# Altium PCB MPBoard_ext.PcbDoc (part 1 of 3)
Units mm, origin at the board's own origin, x right, y up, seen from the top; angles counter-clockwise.
Board outline 305 x 110 mm, 2 copper layers (Top Layer, Bottom Layer), stack 1.571 mm thick; 340 components, 268 nets, 1174 pads, 215 vias.
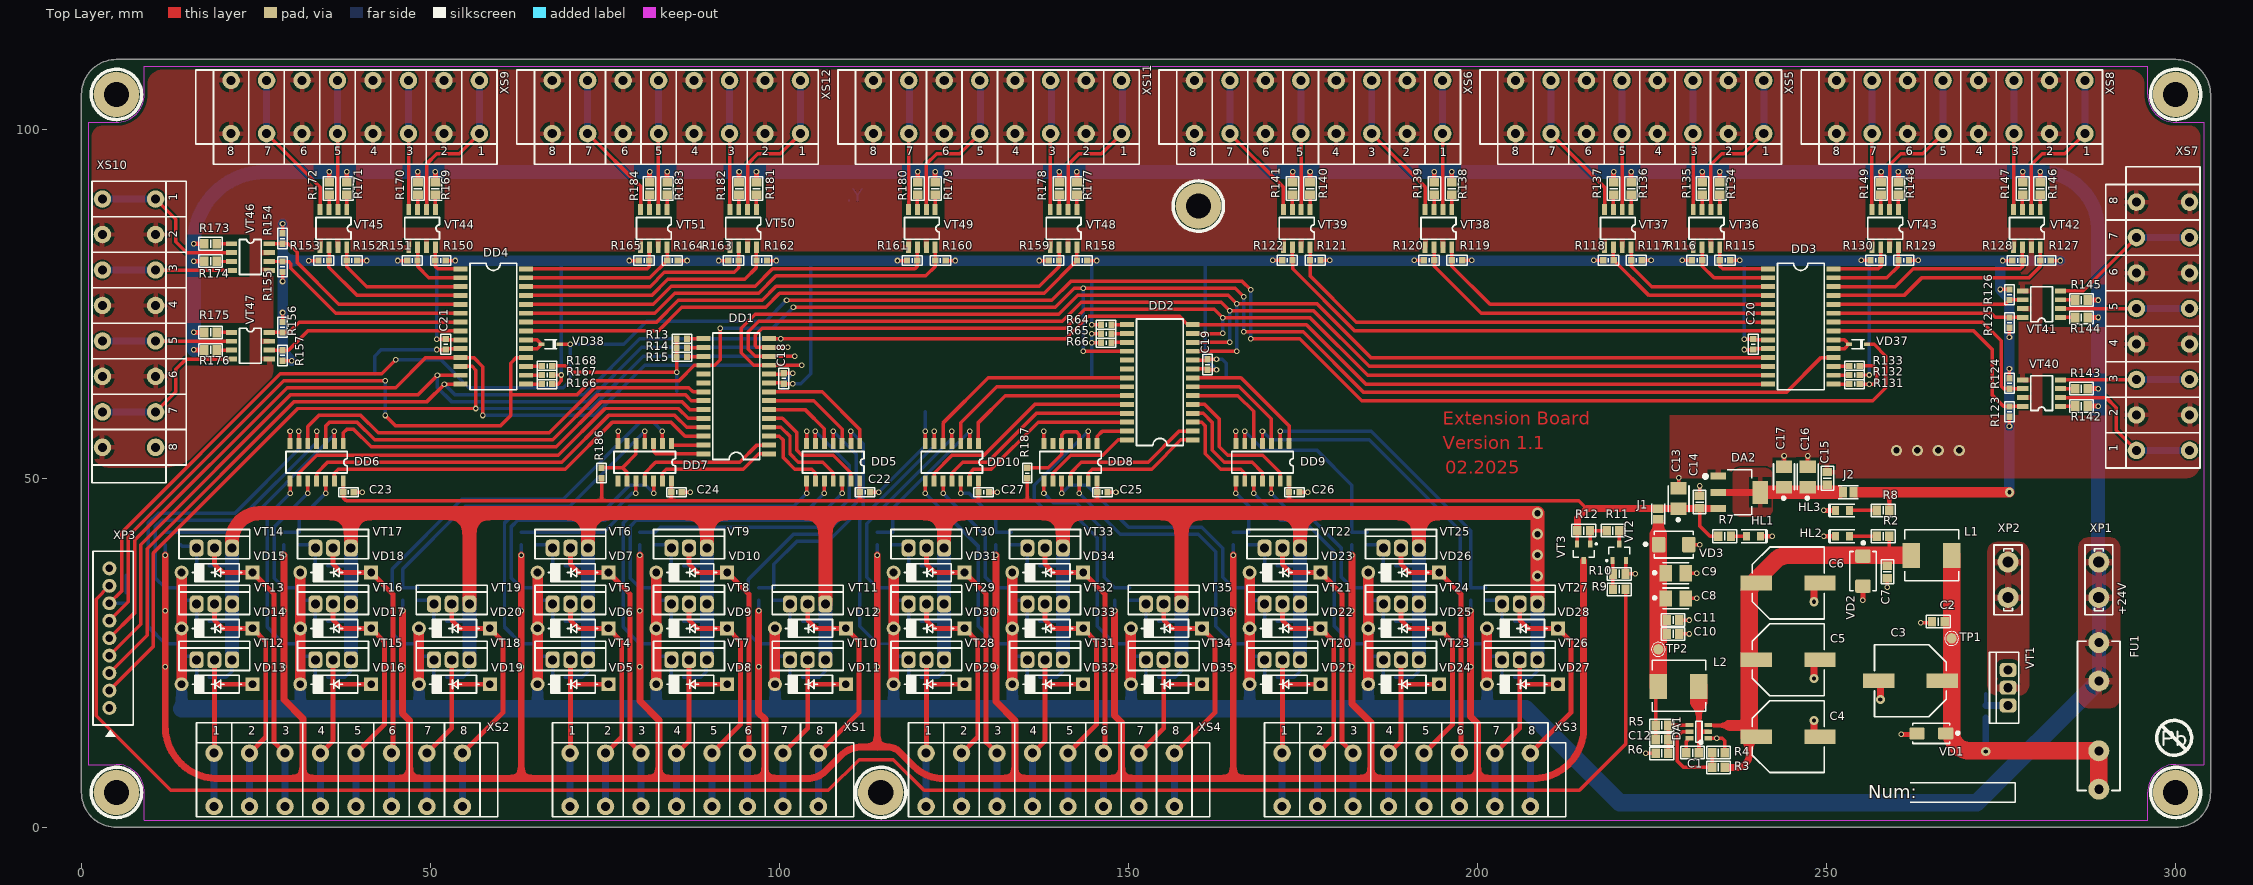
[diagram p0: Top Layer view]
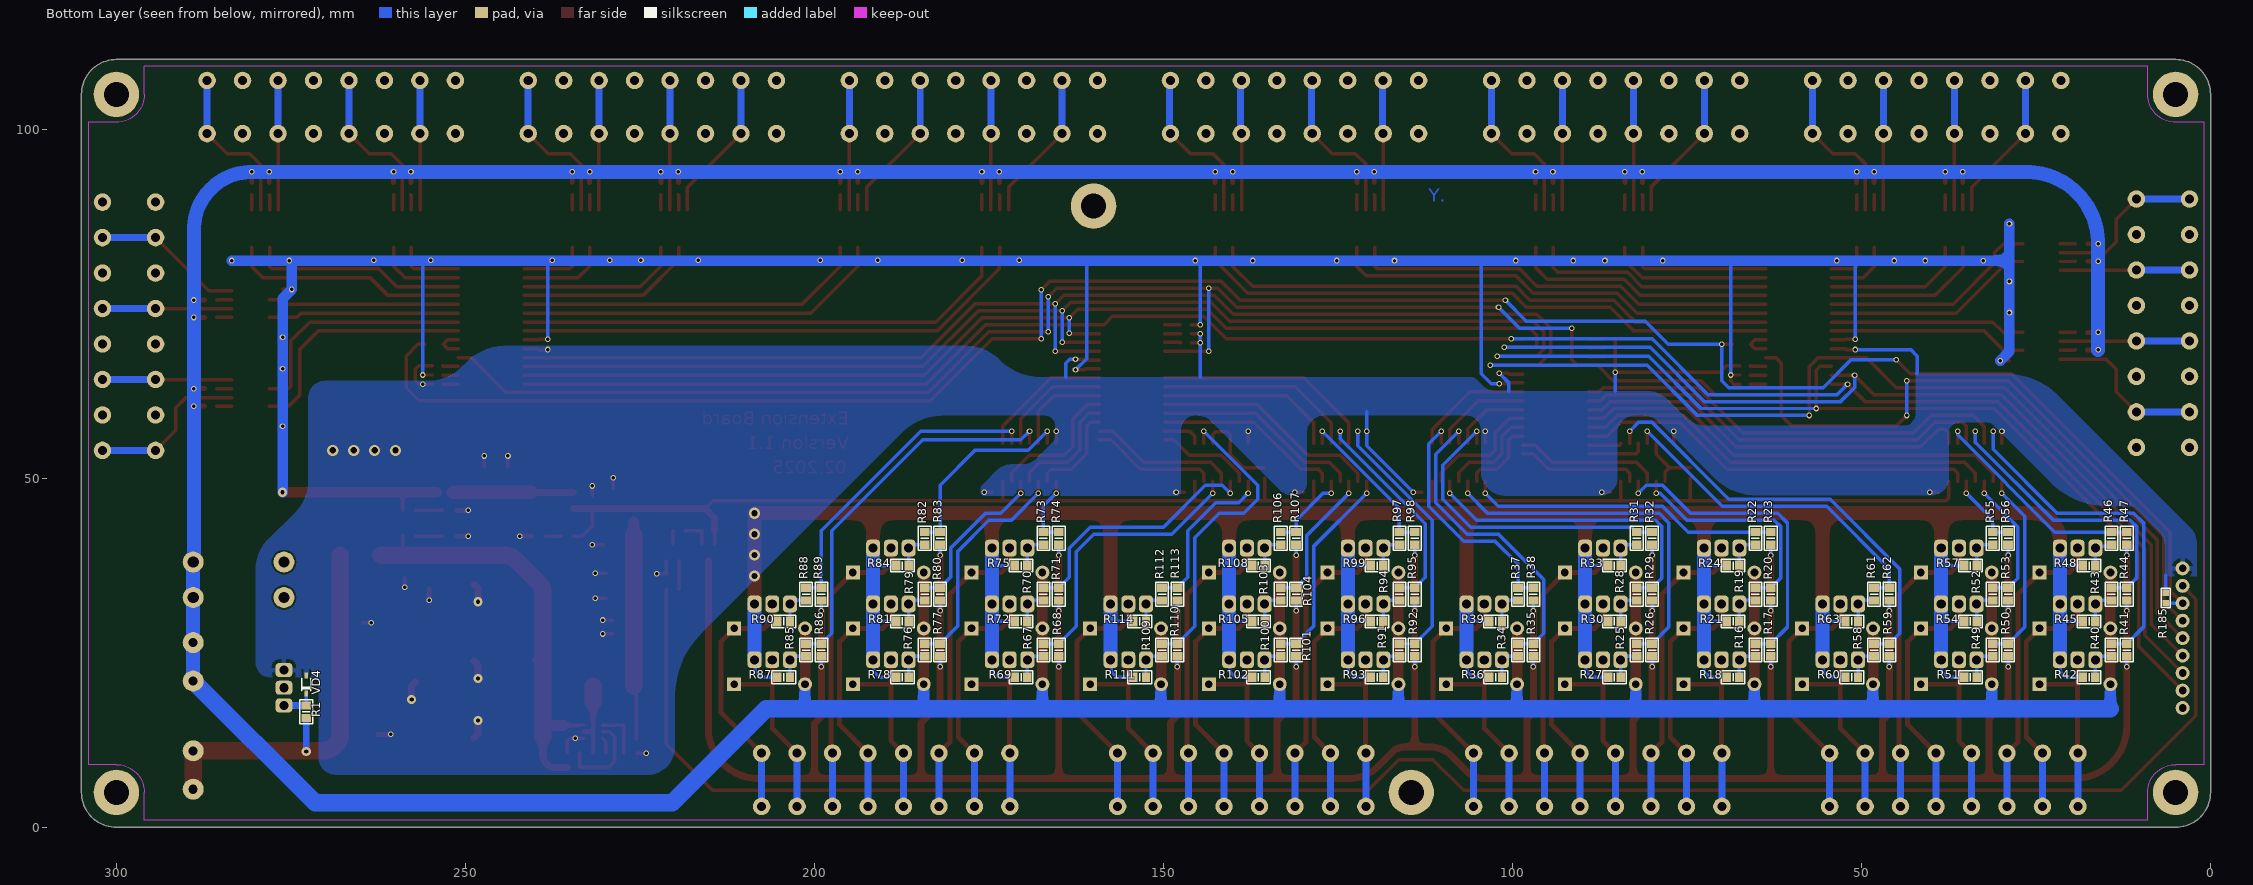
[diagram p1: Bottom Layer view, seen from below]
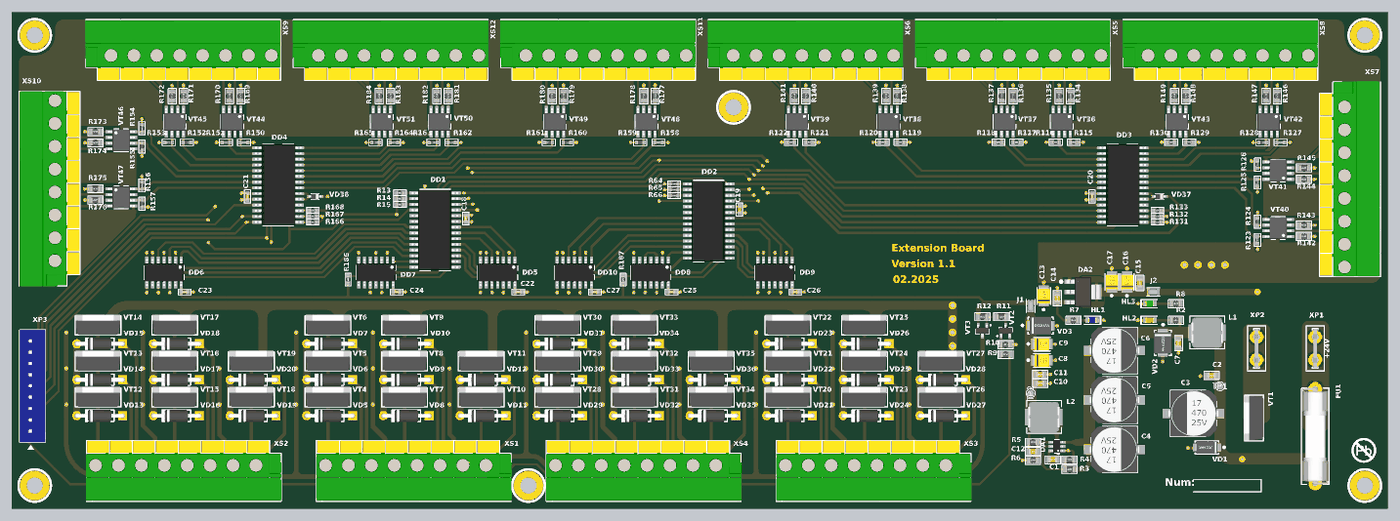
[diagram p4: 3D render of the assembled board from above, using the file's embedded part models]
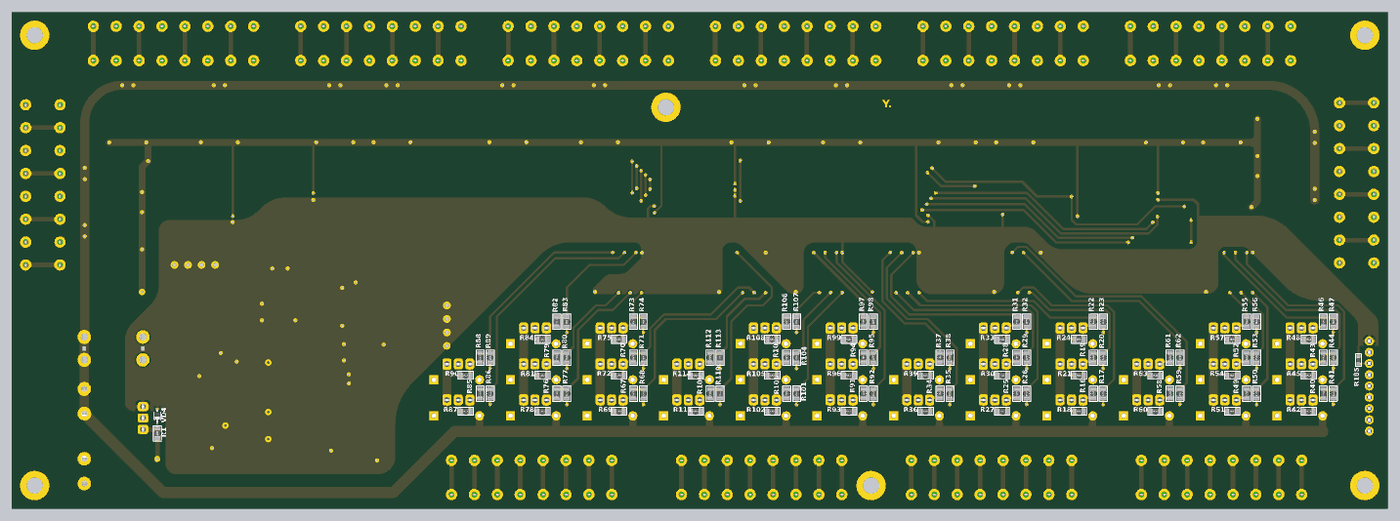
[diagram p5: 3D render of the assembled board from below, using the file's embedded part models]

## Layer stack, top to bottom
Top Solder: solder mask 0.0102, Solder Resist, Dk 3.5
Top Layer: signal copper 0.0356
Dielectric 1: dielectric 1.5, FR-4, Dk 4.8
Bottom Layer: signal copper 0.0356
Bottom Solder: solder mask 0.0102, Solder Resist, Dk 3.5

## Board outline
0,5 0,105 cw(c5,105) 5,110 300,110 cw(c300,105) 305,105 305,5 cw(c300,5) 300,0 5,0 cw(c5,5)

## Design rules (kind name [scope] priority, off if disabled: settings)
Clearance [All] p1: gap=0.25 ignorepadtopadclearanceinfootprint=FALSE
HoleSize [All] p1: absolutevalues=TRUE maxlimit=3.6 minlimit=0.3 maxpercent=80.000 minpercent=20.000
MinimumSolderMaskSliver [All] p1: minsoldermaskwidth=0.05
PolygonConnect gng_top_ploy [IsNamedPolygon('DA2_POLY')] p1: thpad.connectstyle=Relief thpad.reliefconductorwidth=0.7 thpad.reliefentries=4 thpad.polygonreliefangle="90 Angle" thpad.airgapwidth=0.5 smdpad.connectstyle=Relief smdpad.reliefconductorwidth=0.7 smdpad.reliefentries=4 smdpad.polygonreliefangle="90 Angle" smdpad.airgapwidth=0.5 via.connectstyle=Direct via.reliefconductorwidth=0.7 via.reliefentries=4 via.polygonreliefangle="90 Angle" via.airgapwidth=0.5
PolygonConnect PolygonConnect_1 [All] p2: connectstyle=Relief reliefconductorwidth=0.5 reliefentries=4 polygonreliefangle="90 Angle" airgapwidth=0.5
RoutingVias [All] p1: holewidth=0.711 width=1.27 viastyle="Through Hole" minholewidth=0.711 minwidth=1.27 maxholewidth=0.711 maxwidth=1.27 useviatemplates=TRUE viatemplateguid#1={889E8135-1AD9-4337-A910-FD1DCEA28EF9} viatemplateguid#2={62D4C57B-6C9A-40F8-BB9A-F52042807E24} viatemplateguid#3={B69EEB49-2FE6-4CAA-9D47-318B18BA1668} viatemplatename#1=v80h50 viatemplatename#2=v130h60 viatemplatename#3=v160h90
SilkToSilkClearance [All] p1: silktosilkclearance=0
SilkToSolderMaskClearance [IsPad] p1: minsilkscreentomaskgap=0.05 clearancetoexposedcopper=TRUE
SolderMaskExpansion [All] p1: expansion=0.05 istentingtop=FALSE
Width [All] p1: maxlimit=2.5 minlimit=0.3 preferedwidth=0.5
26 further rules are at their usual default settings.

## Components (designator, comment, footprint, x,y, rotation, side; value= is the part's Value field where it differs from the comment)
C1 "0,1 мкФ" CAP-0805 230.8,10.7 r0 top
C2 "0,1 мкФ" CAP-0805 266,29.46 r180 top
C3 "33 мкФ" CAPAE-103 262,21 r180 top
C4 "33 мкФ" CAPAE-103 244.5,13 r0 top
C5 "33 мкФ" CAPAE-103 244.5,24 r0 top
C6 "33 мкФ" CAPAE-103 244.5,35 r0 top
C7 "0,1 мкФ" CAP-0805 258.7,36.6 r270 top
C8 "47 мкФ" CAPMP-3528 228.4,32.8 r0 top
C9 "47 мкФ" CAPMP-3528 228.4,36.4 r0 top
C10 "0,1 мкФ" CAP-0805 228,27.7 r0 top
C11 "0,1 мкФ" CAP-0805 228,29.7 r0 top
C12 "68 пФ" CAP-0805 226.4,12.6 r0 top
C13 "10 мкФ" CAPMP-3528 228.8,47.1 r90 top
C14 "0,1 мкФ" CAP-0805 231.8,46.6 r270 top
C15 "0,1 мкФ" CAP-0805 250.1,50 r270 top
C16 "10 мкФ" CAPMP-3528 247.3,50.2 r90 top
C17 "10 мкФ" CAPMP-3528 243.9,50.2 r90 top
C18 "0,1 мкФ" CAP-0603 100.6,64.3 r270 top
C19 "0,1 мкФ" CAP-0603 161.3,66.3 r270 top
C20 "0,1 мкФ" CAP-0603 239.5,69.2 r90 top
C21 "0,1 мкФ" CAP-0603 52.2,69.2 r90 top
C22 "0,1 мкФ" CAP-0603 112.25,48 r180 top
C23 "0,1 мкФ" CAP-0603 38.25,48 r180 top
C24 "0,1 мкФ" CAP-0603 85.25,48 r180 top
C25 "0,1 мкФ" CAP-0603 146.25,48 r180 top
C26 "0,1 мкФ" CAP-0603 173.75,48 r180 top
C27 "0,1 мкФ" CAP-0603 129.25,48 r180 top
DA1 "TPS54302" SOT23-6 231.7,13.7 r180 top
DA2 "LD1117AS33" "SOT-223 LD1117" 237.5,48 r0 top
DD1 "MCP23S17" SOIC-28 98.5,53.5 r180 top
DD2 "MCP23S17" SOIC-28 159.2,55.5 r180 top
DD3 "MCP23S17" SOIC-28 241.6,80 r0 top
DD4 "MCP23S17" SOIC-28 54.3,80 r0 top
DD5 "SN74LS07D" SOIC-14 111.5,55 r270 top
DD6 "SN74LS07D" SOIC-14 37.5,55 r270 top
DD7 "SN74LS07D" SOIC-14 84.5,55 r270 top
DD8 "SN74LS07D" SOIC-14 145.5,55 r270 top
DD9 "SN74LS07D" SOIC-14 173,55 r270 top
DD10 "SN74LS07D" SOIC-14 128.5,55 r270 top
FU1 "1 A" "FUSE HOLDERS B 5X20" 289,26.46 r270 top
HL1 "Blue" CH0805LB 239.5,41.7 r0 top
HL2 "Red" CH0805LR 252.3,41.7 r180 top
HL3 "Green" CH0805LG 252.3,45.4 r180 top
J1 "Jumper for PCB" "JUMPER-SMD min" 225.9,44.9 r90 top
J2 "Jumper for PCB" "JUMPER-SMD min" 253.1,48 r0 top
L1 "10 мкГн" IND_IHLP2525 265,38.96 r180 top
L2 "10 мкГн" IND_IHLP2525 228.8,20.2 r180 top
R1 "4,7 кОм" RES-0805 272.8,16.56 r270 bottom
R2 "21 кОм" RES-0805 258.1,41.7 r0 top
R3 "560 кОм" RES-0805 234.5,8.6 r180 top
R4 "33 кОм" RES-0805 234.5,10.7 r0 top
R5 "100 кОм" RES-0805 226.4,14.6 r0 top
R6 "13,3 кОм" RES-0805 226.4,10.6 r180 top
R7 "4,3 кОм" RES-0805 235.4,41.7 r0 top
R8 "2 кОм" RES-0805 258.1,45.4 r180 top
R9 "100 Ом" RES-0805 220.3,34.1 r180 top
R10 "4,7 кОм" RES-0805 220.3,36.3 r0 top
R11 "1 кОм" RES-0805 219.4,42.5 r180 top
R12 "4,7 кОм" RES-0805 215.2,42.5 r180 top
R13 "10 кОм" RES-0603#1 86,70 r0 top
R14 "10 кОм" RES-0603#1 86,68.7 r0 top
R15 "10 кОм" RES-0603#1 86,67.4 r0 top
R16 "100 Ом" RES-0805 65.2,25.4 r270 bottom
R17 "390 Ом" RES-0805 63,25.4 r90 bottom
R18 "10 кОм" RES-0805 68.4,21.5 r180 bottom
R19 "100 Ом" RES-0805 65.2,33.4 r270 bottom
R20 "390 Ом" RES-0805 63,33.4 r90 bottom
R21 "10 кОм" RES-0805 68.4,29.5 r180 bottom
R22 "100 Ом" RES-0805 65.2,41.4 r270 bottom
R23 "390 Ом" RES-0805 63,41.4 r90 bottom
R24 "10 кОм" RES-0805 68.4,37.5 r180 bottom
R25 "100 Ом" RES-0805 82.2,25.4 r270 bottom
R26 "390 Ом" RES-0805 80,25.4 r90 bottom
R27 "10 кОм" RES-0805 85.4,21.5 r180 bottom
R28 "100 Ом" RES-0805 82.2,33.4 r270 bottom
R29 "390 Ом" RES-0805 80,33.4 r90 bottom
R30 "10 кОм" RES-0805 85.4,29.5 r180 bottom
R31 "100 Ом" RES-0805 82.2,41.4 r270 bottom
R32 "390 Ом" RES-0805 80,41.4 r90 bottom
R33 "10 кОм" RES-0805 85.4,37.5 r180 bottom
R34 "100 Ом" RES-0805 99.2,25.4 r270 bottom
R35 "390 Ом" RES-0805 97,25.4 r90 bottom
R36 "10 кОм" RES-0805 102.4,21.5 r180 bottom
R37 "100 Ом" RES-0805 99.2,33.4 r270 bottom
R38 "390 Ом" RES-0805 97,33.4 r90 bottom
R39 "10 кОм" RES-0805 102.4,29.5 r180 bottom
R40 "100 Ом" RES-0805 14.2,25.4 r270 bottom
R41 "390 Ом" RES-0805 12,25.4 r90 bottom
R42 "10 кОм" RES-0805 17.4,21.5 r180 bottom
R43 "100 Ом" RES-0805 14.2,33.4 r270 bottom
R44 "390 Ом" RES-0805 12,33.4 r90 bottom
R45 "10 кОм" RES-0805 17.4,29.5 r180 bottom
R46 "100 Ом" RES-0805 14.2,41.4 r270 bottom
R47 "390 Ом" RES-0805 12,41.4 r90 bottom
R48 "10 кОм" RES-0805 17.4,37.5 r180 bottom
R49 "100 Ом" RES-0805 31.2,25.4 r270 bottom
R50 "390 Ом" RES-0805 29,25.4 r90 bottom
R51 "10 кОм" RES-0805 34.4,21.5 r180 bottom
R52 "100 Ом" RES-0805 31.2,33.4 r270 bottom
R53 "390 Ом" RES-0805 29,33.4 r90 bottom
R54 "10 кОм" RES-0805 34.4,29.5 r180 bottom
R55 "100 Ом" RES-0805 31.2,41.4 r270 bottom
R56 "390 Ом" RES-0805 29,41.4 r90 bottom
R57 "10 кОм" RES-0805 34.4,37.5 r180 bottom
R58 "100 Ом" RES-0805 48.2,25.4 r270 bottom
R59 "390 Ом" RES-0805 46,25.4 r90 bottom
R60 "10 кОм" RES-0805 51.4,21.5 r180 bottom
R61 "100 Ом" RES-0805 48.2,33.4 r270 bottom
R62 "390 Ом" RES-0805 46,33.4 r90 bottom
R63 "10 кОм" RES-0805 51.4,29.5 r180 bottom
R64 "10 кОм" RES-0603#2 146.8,72 r180 top
R65 "10 кОм" RES-0603#2 146.8,70.7 r0 top
R66 "10 кОм" RES-0603#2 146.8,69.4 r0 top
R67 "100 Ом" RES-0805 167.2,25.4 r270 bottom
R68 "390 Ом" RES-0805 165,25.4 r90 bottom
R69 "10 кОм" RES-0805 170.4,21.5 r180 bottom
R70 "100 Ом" RES-0805 167.2,33.4 r270 bottom
R71 "390 Ом" RES-0805 165,33.4 r90 bottom
R72 "10 кОм" RES-0805 170.4,29.5 r180 bottom
R73 "100 Ом" RES-0805 167.2,41.4 r270 bottom
R74 "390 Ом" RES-0805 165,41.4 r90 bottom
R75 "10 кОм" RES-0805 170.4,37.5 r180 bottom
R76 "100 Ом" RES-0805 184.2,25.4 r270 bottom
R77 "390 Ом" RES-0805 182,25.4 r90 bottom
R78 "10 кОм" RES-0805 187.4,21.5 r180 bottom
R79 "100 Ом" RES-0805 184.2,33.4 r270 bottom
R80 "390 Ом" RES-0805 182,33.4 r90 bottom
R81 "10 кОм" RES-0805 187.4,29.5 r180 bottom
R82 "100 Ом" RES-0805 184.2,41.4 r270 bottom
R83 "390 Ом" RES-0805 182,41.4 r90 bottom
R84 "10 кОм" RES-0805 187.4,37.5 r180 bottom
R85 "100 Ом" RES-0805 201.2,25.4 r270 bottom
R86 "390 Ом" RES-0805 199,25.4 r90 bottom
R87 "10 кОм" RES-0805 204.4,21.5 r180 bottom
R88 "100 Ом" RES-0805 201.2,33.4 r270 bottom
R89 "390 Ом" RES-0805 199,33.4 r90 bottom
R90 "10 кОм" RES-0805 204.4,29.5 r180 bottom
R91 "100 Ом" RES-0805 116.2,25.4 r270 bottom
R92 "390 Ом" RES-0805 114,25.4 r90 bottom
R93 "10 кОм" RES-0805 119.4,21.5 r180 bottom
R94 "100 Ом" RES-0805 116.2,33.4 r270 bottom
R95 "390 Ом" RES-0805 114,33.4 r90 bottom
R96 "10 кОм" RES-0805 119.4,29.5 r180 bottom
R97 "100 Ом" RES-0805 116.2,41.4 r270 bottom
R98 "390 Ом" RES-0805 114,41.4 r90 bottom
R99 "10 кОм" RES-0805 119.4,37.5 r180 bottom
R100 "100 Ом" RES-0805 133.2,25.4 r270 bottom
R101 "390 Ом" RES-0805 131,25.4 r90 bottom
R102 "10 кОм" RES-0805 136.4,21.5 r180 bottom
R103 "100 Ом" RES-0805 133.2,33.4 r270 bottom
R104 "390 Ом" RES-0805 131,33.4 r90 bottom
R105 "10 кОм" RES-0805 136.4,29.5 r180 bottom
R106 "100 Ом" RES-0805 133.2,41.4 r270 bottom
R107 "390 Ом" RES-0805 131,41.4 r90 bottom
R108 "10 кОм" RES-0805 136.4,37.5 r180 bottom
R109 "100 Ом" RES-0805 150.2,25.4 r270 bottom
R110 "390 Ом" RES-0805 148,25.4 r90 bottom
R111 "10 кОм" RES-0805 153.4,21.5 r180 bottom
R112 "100 Ом" RES-0805 150.2,33.4 r270 bottom
R113 "390 Ом" RES-0805 148,33.4 r90 bottom
R114 "10 кОм" RES-0805 153.4,29.5 r180 bottom
R115 "4,7кОм" RES-0603#2 235.45,81.25 r0 top
R116 "4,7кОм" RES-0603#2 231.45,81.25 r180 top
R117 "4,7кОм" RES-0603#2 222.75,81.25 r0 top
R118 "4,7кОм" RES-0603#2 218.75,81.25 r180 top
R119 "4,7кОм" RES-0603#2 197.05,81.25 r0 top
R120 "4,7кОм" RES-0603#2 193.05,81.25 r180 top
R121 "4,7кОм" RES-0603#2 176.75,81.25 r0 top
R122 "4,7кОм" RES-0603#2 172.75,81.25 r180 top
R123 "4,7кОм" RES-0603#2 276.2,59.55 r270 top
R124 "4,7кОм" RES-0603#2 276.2,63.6 r90 top
R125 "4,7кОм" RES-0603#2 276.2,72.3 r270 top
R126 "4,7кОм" RES-0603#2 276.2,76.3 r90 top
R127 "4,7кОм" RES-0603#2 281.35,81.2 r0 top
R128 "4,7кОм" RES-0603#2 277.35,81.2 r180 top
R129 "4,7кОм" RES-0603#2 261.05,81.25 r0 top
R130 "4,7кОм" RES-0603#2 257.05,81.25 r180 top
R131 "10 кОм" RES-0603#2 254,63.5 r0 top
R132 "10 кОм" RES-0603#2 254,64.8 r0 top
R133 "10 кОм" RES-0603#2 254,66.1 r180 top
R134 "2,2 кОм" RES-0805 234.7,91.5 r270 top
R135 "2,2 кОм" RES-0805 232.2,91.5 r270 top
R136 "2,2 кОм" RES-0805 222,91.5 r270 top
R137 "2,2 кОм" RES-0805 219.5,91.5 r270 top
R138 "2,2 кОм" RES-0805 196.3,91.5 r270 top
R139 "2,2 кОм" RES-0805 193.8,91.5 r270 top
R140 "2,2 кОм" RES-0805 176,91.5 r270 top
R141 "2,2 кОм" RES-0805 173.5,91.5 r270 top
R142 "2,2 кОм" RES-0805 286.5,60.34 r180 top
R143 "2,2 кОм" RES-0805 286.5,62.84 r180 top
R144 "2,2 кОм" RES-0805 286.5,73.04 r180 top
R145 "2,2 кОм" RES-0805 286.5,75.54 r180 top
R146 "2,2 кОм" RES-0805 280.6,91.5 r270 top
R147 "2,2 кОм" RES-0805 278.1,91.5 r270 top
R148 "2,2 кОм" RES-0805 260.3,91.5 r270 top
R149 "2,2 кОм" RES-0805 257.8,91.5 r270 top
R150 "4,7кОм" RES-0603#2 51.45,81.2 r0 top
R151 "4,7кОм" RES-0603#2 47.4,81.2 r180 top
R152 "4,7кОм" RES-0603#2 38.75,81.2 r0 top
R153 "4,7кОм" RES-0603#2 34.7,81.2 r180 top
R154 "4,7кОм" RES-0603#2 28.8,84.35 r90 top
R155 "4,7кОм" RES-0603#2 28.8,80.3 r270 top
R156 "4,7кОм" RES-0603#2 28.8,71.65 r90 top
R157 "4,7кОм" RES-0603#2 28.8,67.6 r270 top
R158 "4,7кОм" RES-0603#2 143.35,81.2 r0 top
R159 "4,7кОм" RES-0603#2 139.3,81.2 r180 top
R160 "4,7кОм" RES-0603#2 123.05,81.2 r0 top
R161 "4,7кОм" RES-0603#2 119,81.2 r180 top
R162 "4,7кОм" RES-0603#2 97.45,81.2 r0 top
R163 "4,7кОм" RES-0603#2 93.4,81.2 r180 top
R164 "4,7кОм" RES-0603#2 84.65,81.2 r0 top
R165 "4,7кОм" RES-0603#2 80.6,81.2 r180 top
R166 "10 кОм" RES-0603#2 66.7,63.5 r0 top
R167 "10 кОм" RES-0603#2 66.7,64.8 r0 top
R168 "10 кОм" RES-0603#2 66.7,66.1 r180 top
R169 "2,2 кОм" RES-0805 50.7,91.5 r270 top
R170 "2,2 кОм" RES-0805 48.2,91.5 r270 top
R171 "2,2 кОм" RES-0805 38,91.5 r270 top
R172 "2,2 кОм" RES-0805 35.5,91.5 r270 top
R173 "2,2 кОм" RES-0805 18.5,83.6 r0 top
R174 "2,2 кОм" RES-0805 18.5,81.1 r0 top
R175 "2,2 кОм" RES-0805 18.5,70.9 r0 top
R176 "2,2 кОм" RES-0805 18.5,68.4 r0 top
R177 "2,2 кОм" RES-0805 142.6,91.5 r270 top
R178 "2,2 кОм" RES-0805 140.1,91.5 r270 top
R179 "2,2 кОм" RES-0805 122.3,91.5 r270 top
R180 "2,2 кОм" RES-0805 119.8,91.5 r270 top
R181 "2,2 кОм" RES-0805 96.7,91.5 r270 top
R182 "2,2 кОм" RES-0805 94.2,91.5 r270 top
R183 "2,2 кОм" RES-0805 83.9,91.5 r270 top
R184 "2,2 кОм" RES-0805 81.4,91.5 r270 top
R185 "10 кОм" RES-0603#1 6.4,32.85 r270 bottom
R186 "10 кОм" RES-0603#1 74.5,50.75 r90 top
R187 "10 кОм" RES-0603#2 135.5,50.75 r270 top
TP1 "*" TP_1.5 267.9,27.06 r180 top
TP2 "*" TP_1.5 225.9,25.5 r90 top
VD1 "TSSA5U60 E3G" "DIODE SMA" 265,13.46 r0 top
VD2 "SMBJ24CA" "DIODE SMB" 255.2,36.7 r90 top
VD3 "SMBJ5.0CA-TR" "DIODE SMB" 228.1,40.5 r180 top
VD4 "MM3Z12VT1G" SOD-323 272.8,20.46 r270 bottom
VD5 "HER108" DIOD-MILS-400 75.5,20.5 r180 top
VD6 "HER108" DIOD-MILS-400 75.5,28.5 r180 top
VD7 "HER108" DIOD-MILS-400 75.5,36.5 r180 top
VD8 "HER108" DIOD-MILS-400 92.5,20.5 r180 top
VD9 "HER108" DIOD-MILS-400 92.5,28.5 r180 top
VD10 "HER108" DIOD-MILS-400 92.5,36.5 r180 top
VD11 "HER108" DIOD-MILS-400 109.5,20.5 r180 top
VD12 "HER108" DIOD-MILS-400 109.5,28.5 r180 top
VD13 "HER108" DIOD-MILS-400 24.5,20.5 r180 top
VD14 "HER108" DIOD-MILS-400 24.5,28.5 r180 top
VD15 "HER108" DIOD-MILS-400 24.5,36.5 r180 top
VD16 "HER108" DIOD-MILS-400 41.5,20.5 r180 top
VD17 "HER108" DIOD-MILS-400 41.5,28.5 r180 top
VD18 "HER108" DIOD-MILS-400 41.5,36.5 r180 top
VD19 "HER108" DIOD-MILS-400 58.5,20.5 r180 top
VD20 "HER108" DIOD-MILS-400 58.5,28.5 r180 top
VD21 "HER108" DIOD-MILS-400 177.5,20.5 r180 top
VD22 "HER108" DIOD-MILS-400 177.5,28.5 r180 top
VD23 "HER108" DIOD-MILS-400 177.5,36.5 r180 top
VD24 "HER108" DIOD-MILS-400 194.5,20.5 r180 top
VD25 "HER108" DIOD-MILS-400 194.5,28.5 r180 top
VD26 "HER108" DIOD-MILS-400 194.5,36.5 r180 top
VD27 "HER108" DIOD-MILS-400 211.5,20.5 r180 top
VD28 "HER108" DIOD-MILS-400 211.5,28.5 r180 top
VD29 "HER108" DIOD-MILS-400 126.5,20.5 r180 top
VD30 "HER108" DIOD-MILS-400 126.5,28.5 r180 top
VD31 "HER108" DIOD-MILS-400 126.5,36.5 r180 top
VD32 "HER108" DIOD-MILS-400 143.5,20.5 r180 top
VD33 "HER108" DIOD-MILS-400 143.5,28.5 r180 top
VD34 "HER108" DIOD-MILS-400 143.5,36.5 r180 top
VD35 "HER108" DIOD-MILS-400 160.5,20.5 r180 top
VD36 "HER108" DIOD-MILS-400 160.5,28.5 r180 top
VD37 "1N4148WS" SOD-323 254.5,69.2 r0 top
VD38 "1N4148WS" SOD-323 67.2,69.2 r0 top
VT1 "IRFZ44N" "TO220S inline" 276,17.46 r90 top
VT2 "BC846B" SOT23 220.3,39.4 r90 top
VT3 "IRLML9303TRPBF" SOT23 215.2,39.4 r270 top
VT4 "КП745Г" "TO220S inline" 67.5,24 r0 top
VT5 "КП745Г" "TO220S inline" 67.5,32 r0 top
VT6 "КП745Г" "TO220S inline" 67.5,40 r0 top
VT7 "КП745Г" "TO220S inline" 84.5,24 r0 top
VT8 "КП745Г" "TO220S inline" 84.5,32 r0 top
VT9 "КП745Г" "TO220S inline" 84.5,40 r0 top
VT10 "КП745Г" "TO220S inline" 101.5,24 r0 top
VT11 "КП745Г" "TO220S inline" 101.5,32 r0 top
VT12 "КП745Г" "TO220S inline" 16.5,24 r0 top
VT13 "КП745Г" "TO220S inline" 16.5,32 r0 top
VT14 "КП745Г" "TO220S inline" 16.5,40 r0 top
VT15 "КП745Г" "TO220S inline" 33.5,24 r0 top
VT16 "КП745Г" "TO220S inline" 33.5,32 r0 top
VT17 "КП745Г" "TO220S inline" 33.5,40 r0 top
VT18 "КП745Г" "TO220S inline" 50.5,24 r0 top
VT19 "КП745Г" "TO220S inline" 50.5,32 r0 top
VT20 "КП745Г" "TO220S inline" 169.5,24 r0 top
VT21 "КП745Г" "TO220S inline" 169.5,32 r0 top
VT22 "КП745Г" "TO220S inline" 169.5,40 r0 top
VT23 "КП745Г" "TO220S inline" 186.5,24 r0 top
VT24 "КП745Г" "TO220S inline" 186.5,32 r0 top
VT25 "КП745Г" "TO220S inline" 186.5,40 r0 top
VT26 "КП745Г" "TO220S inline" 203.5,24 r0 top
VT27 "КП745Г" "TO220S inline" 203.5,32 r0 top
VT28 "КП745Г" "TO220S inline" 118.5,24 r0 top
VT29 "КП745Г" "TO220S inline" 118.5,32 r0 top
VT30 "КП745Г" "TO220S inline" 118.5,40 r0 top
VT31 "КП745Г" "TO220S inline" 135.5,24 r0 top
VT32 "КП745Г" "TO220S inline" 135.5,32 r0 top
VT33 "КП745Г" "TO220S inline" 135.5,40 r0 top
VT34 "КП745Г" "TO220S inline" 152.5,24 r0 top
VT35 "КП745Г" "TO220S inline" 152.5,32 r0 top
VT36 "ILD207T" SOIC-8 234.7,88.5 r270 top
VT37 "ILD207T" SOIC-8 222,88.5 r270 top
VT38 "ILD207T" SOIC-8 196.3,88.5 r270 top
VT39 "ILD207T" SOIC-8 176,88.5 r270 top
VT40 "ILD207T" SOIC-8 283.5,60.3 r180 top
VT41 "ILD207T" SOIC-8 283.5,73.04 r180 top
VT42 "ILD207T" SOIC-8 280.6,88.5 r270 top
VT43 "ILD207T" SOIC-8 260.3,88.5 r270 top
VT44 "ILD207T" SOIC-8 50.7,88.5 r270 top
VT45 "ILD207T" SOIC-8 38,88.5 r270 top
VT46 "ILD207T" SOIC-8 21.5,83.6 r0 top
VT47 "ILD207T" SOIC-8 21.5,70.9 r0 top
VT48 "ILD207T" SOIC-8 142.6,88.5 r270 top
VT49 "ILD207T" SOIC-8 122.3,88.5 r270 top
VT50 "ILD207T" SOIC-8 96.7,88.5 r270 top
VT51 "ILD207T" SOIC-8 83.9,88.5 r270 top
XP1 "KLS8-01128-PC-250" "PCB TAB 4" 289,35.46 r270 top
XP2 "KLS8-01128-PC-250" "PCB TAB 4" 276,35.46 r270 top
XP3 "B9B-XH-A" JST-B9B-XH-A 4,17.1 r90 top
XS1 "DG142V-5.08- 08P" DG142V-5.08-08 70,3 r0 top
XS2 "DG142V-5.08- 08P" DG142V-5.08-08 19,3 r0 top
XS3 "DG142V-5.08- 08P" DG142V-5.08-08 172,3 r0 top
XS4 "DG142V-5.08- 08P" DG142V-5.08-08 121,3 r0 top
XS5 "DG142V-5.08- 08P" DG142V-5.08-08 241,107 r180 top
XS6 "DG142V-5.08- 08P" DG142V-5.08-08 195,107 r180 top
XS7 "DG142V-5.08- 08P" DG142V-5.08-08 302,54 r90 top
XS8 "DG142V-5.08- 08P" DG142V-5.08-08 287,107 r180 top
XS9 "DG142V-5.08- 08P" DG142V-5.08-08 57,107 r180 top
XS10 "DG142V-5.08- 08P" DG142V-5.08-08 3,90 r270 top
XS11 "DG142V-5.08- 08P" DG142V-5.08-08 149,107 r180 top
XS12 "DG142V-5.08- 08P" DG142V-5.08-08 103,107 r180 top

## Footprints (in the part's own frame and the unit in brackets; to place one, negate y for a bottom-side part, rotate by r counter-clockwise, add the part's x,y. Pads: shape width x height; smd on the part's side, far side on the other; paste and mask are expansions set on the pad)
CAP-0603 [mm]
  rect 0.9x0.9 smd: 1(-0.75,0) 2(0.75,0)
  silkscreen extent 0,-0.3 0,0.3, body extent -0.8,-0.4 0.8,0.4, height 0.9
CAP-0805 [mm]
  rect 1.2x1.4 smd: 1(-0.9,0) 2(0.9,0)
  silkscreen extent 0,-0.57 0,0.57, body extent -1,-0.63 1,0.63, height 1.3
CAPAE-103 [mm]
  rect 4.5x2.1 smd: 1(-4.55,0) 2(4.55,0)
  silkscreen extent -5.15,-5.15 5.15,5.15, body extent -5.5,-5.15 5.5,5.15, height 10
CAPMP-3528 [mm]
  rect 1.8x2.3 smd: 1(-1.45,0) 2(1.45,0)
  silkscreen extent -3.19,-1.5 1.85,1.5, body extent -1.75,-1.4 1.75,1.4, height 1.93
CH0805LB [mm]
  rect 1x1.25 smd: 1(-1,0) 2(1,0)
  silkscreen extent -1.7,-0.9 1.9,0.9, body extent -0.95,-0.62 1.05,0.63, height 1.1
CH0805LG [mm]
  rect 1x1.25 smd: 1(-1,0) 2(1,0)
  silkscreen extent -1.7,-0.9 1.9,0.9, body extent -0.95,-0.62 1.05,0.63, height 1.1
CH0805LR [mm]
  rect 1x1.25 smd: 1(-1,0) 2(1,0)
  silkscreen extent -1.7,-0.9 1.9,0.9, body extent -1,-0.63 1,0.62, height 1.1
DG142V-5.08-08 [mm]
  round 2.5 hole 1.3: 1(0,0) 2(5.08,0) 3(10.16,0) 4(15.24,0) 5(20.32,0) 6(25.4,0) 7(30.48,0) 8(35.56,0) 9(0,7.62) 10(5.08,7.62) 11(10.16,7.62) 12(15.24,7.62) 13(20.32,7.62) 14(25.4,7.62) 15(30.48,7.62) 16(35.56,7.62)
  silkscreen extent -2.54,-1.5 40.64,12, body extent -2.59,-1.42 40.75,11.98, height 14.2
DIOD-MILS-400 [mm]
  rect 2x2 hole 1.1: 1(0,0)
  round 2 hole 1.1: 2(10.16,0)
  silkscreen extent 1.52,-1.27 8.64,1.27, body extent -0.48,-1.35 10.58,1.35, height 2.7
"DIODE SMA" [mm]
  rrect20% 2.2x1.7 smd: 1(-2.05,0) 2(2.05,0)
  silkscreen extent -2.65,-1.45 3.95,1.45, body extent -2.74,-1.4 2.74,1.4, height 2.29
"DIODE SMB" [mm]
  rrect20% 1.9x2.2 smd: 1(-2.15,0) 2(2.15,0)
  silkscreen extent -2.8,-1.9 4.19,1.9, body extent -2.79,-1.97 2.79,1.97, height 2.63
"FUSE HOLDERS B 5X20" [mm]
  round 3 hole 1.3: 1(0,0) 2(15.5,0) 3(5.5,0) 4(21,0)
  silkscreen extent -0.2,-3.05 21.2,3.05, body extent -0.2,-2.95 21.2,2.95, height 9.25
IND_IHLP2525 [mm] "SMD inductor, 6.47x6.47 mm"
  rect 2.5x3.6 smd: 1(-2.9,0) 2(2.9,0)
  silkscreen extent -3.9,-3.7 3.8,3.6, body extent -3.56,-3.35 3.51,3.33, height 2.89
JST-B9B-XH-A [mm]
  round 2 hole 1.1: 1(0,0) 2(2.5,0) 3(5,0) 4(7.5,0) 5(10,0) 6(12.5,0) 7(15,0) 8(17.5,0) 9(20,0)
  silkscreen extent -4.1,-3.4 22.45,2.35, body extent -2.45,-3.4 22.45,2.35, height 7.02
"JUMPER-SMD min" [mm]
  rect 1.2x1.5 smd: 1(-0.75,0) 2(0.75,0)
  silkscreen extent -1.45,-0.95 1.43,0.95, body extent -1.3,-0.7 1.3,0.7, height 0.7
"PCB TAB 4" [mm]
  round 3 hole 1.6: 1(-2.54,0) 2(2.54,0)
  silkscreen extent -4.44,-0.64 4.44,0.64, body extent -4.4,-0.4 4.4,0.4, height 12.7
RES-0603#1 [mm]
  rect 0.9x0.9 smd mask+0.04: 1(-0.75,0) 2(0.75,0)
  body extent -0.8,-0.4 0.8,0.4, height 0.5
RES-0603#2 [mm]
  rect 0.9x0.9 smd: 1(-0.75,0) 2(0.75,0)
  silkscreen extent 0,-0.3 0,0.3, body extent -0.8,-0.4 0.8,0.4, height 0.5
RES-0805 [mm]
  rect 1.2x1.4 smd: 1(-0.9,0) 2(0.9,0)
  silkscreen extent 0,-0.57 0,0.57, body extent -1.03,-0.63 0.97,0.63, height 0.45
SOD-323 [mm]
  rect 0.9x0.5 smd: 1(-1.3,0) 2(1.3,0)
  silkscreen extent -0.85,-0.65 0.85,0.65, body extent -1.35,-0.67 1.35,0.68, height 0.81
SOIC-8 [mm] "YB"
  rect 1.6x0.7 smd: 1(0,0) 2(0,-1.27) 3(0,-2.54) 4(0,-3.81) 5(5.4,-3.81) 6(5.4,-2.54) 7(5.4,-1.27) 8(5.4,0)
  silkscreen extent 1.15,-4.41 4.25,0.6, body extent -0.3,-4.38 5.7,0.53, height 1.75
SOIC-14 [mm] "YB"
  rect 1.6x0.7 smd: 1(0,0) 2(0,-1.27) 3(0,-2.54) 4(0,-3.81) 5(0,-5.08) 6(0,-6.35) 7(0,-7.62) 8(5.4,-7.62) 9(5.4,-6.35) 10(5.4,-5.08) 11(5.4,-3.81) 12(5.4,-2.54) 13(5.4,-1.27) 14(5.4,0)
  silkscreen extent 1.15,-8.21 4.25,0.59, body extent -0.3,-8.2 5.7,0.55, height 1.72
SOIC-28 [mm]
  rect 2x0.7 smd: 1(0,0) 2(0,-1.27) 3(0,-2.54) 4(0,-3.81) 5(0,-5.08) 6(0,-6.35) 7(0,-7.62) 8(0,-8.89) 9(0,-10.16) 10(0,-11.43) 11(0,-12.7) 12(0,-13.97) 13(0,-15.24) 14(0,-16.51) 15(9.4,-16.51) 16(9.4,-15.24) 17(9.4,-13.97) 18(9.4,-12.7) 19(9.4,-11.43) 20(9.4,-10.16) 21(9.4,-8.89) 22(9.4,-7.62) 23(9.4,-6.35) 24(9.4,-5.08) 25(9.4,-3.81) 26(9.4,-2.54) 27(9.4,-1.27) 28(9.4,0)
  silkscreen extent 1.35,-17.3 8.05,0.79, body extent -0.4,-17.17 9.9,0.73, height 2.73
SOT23 [mm] "YB, 3-Leads, Body 3,0x2,6mm (max), Pitch 0,95mm, IPC Medium Density"
  rect 1x0.6 smd: 1(-1.2,0.95) 2(-1.2,-0.95) 3(1.2,0)
  silkscreen extent -1.32,-1.5 0.7,1.92, body extent -1.32,-1.52 1.32,1.52, height 1.12
SOT23-6 [mm] "YB"
  rect 1.1x0.6 smd: 1(-1.35,0.95) 2(-1.35,0) 3(-1.35,-0.95) 4(1.35,-0.95) 5(1.35,0) 6(1.35,0.95)
  silkscreen extent -0.5,-1.5 0.45,1.7, body extent -1.4,-1.45 1.4,1.45, height 1.43
"SOT-223 LD1117" [mm]
  rect 2.2x1 smd: 1(-3,2.3) 2(-3,0) 3(-3,-2.3)
  rect 2.2x3.3 smd: 4(3,0)
  silkscreen extent -5.1,-3.25 1.75,3.25, body extent -3.64,-3.35 3.64,3.35, height 1.81
"TO220S inline" [mm]
  rrect50% 2x2.4 hole 1.3: 1(0,0) 2(2.54,0) 3(5.08,0)
  silkscreen extent -2.54,-1.52 7.62,2.67, body extent -2.41,-1.55 7.49,2.91, height 20.05
TP_1.5 [mm] "Test Point 1.5 mm"
  round 1.5 smd mask+0: 1(0,0)
  silkscreen extent -1,-1 1,1, body extent -0.01,-0.01 0.01,0.01, height 0.01

## Part data
C1 C7 C10: library part C, "Конденсатор", Dielectric=X7R, IPSPartNumber=65-724-19, Manufacturer=KEMET, ManufacturerPartNumber=C0805C104K5RACTU, Package="SMD 0805", Tolerance="± 10 %", ValueDescription="Конденсатор 0,1 мкФ ± 10 % 50 В X7R SMD 0805", Voltage="50 В", HelpURL=https://content.kemet.com/datasheets/KEM_C1002_X7R_SMD.pdf, NameRUS=Конденсатор
C2: library part C, "Конденсатор", Dielectric=X7R, IPSPartNumber=65-724-19, Manufacturer=KEMET, Package="SMD 0805", Tolerance="± 10 %", ValueDescription="Конденсатор 0,1 мкФ ± 10 % 50 В X7R SMD 0805", Voltage="50 В", HelpURL=https://content.kemet.com/datasheets/KEM_C1002_X7R_SMD.pdf, NameRUS=Конденсатор
C3 C4: library part C_POLAR, "Конденсатор полярный", Package="ECAP SMD", Tolerance="± 10 %", ValueDescription="Конденсатор 33 мкФ ± 10 % 50 В ECAP SMD", Voltage="50 В", NameRUS=Конденсатор
C5 C6: library part C_POLAR, "Конденсатор полярный", IPSPartNumber=2283588, Package="ECAP SMD", Tolerance="± 10 %", ValueDescription="Конденсатор 33 мкФ ± 10 % 50 В ECAP SMD", Voltage="50 В", HelpURL=https://api.kemet.com/component-edge/download/datasheet/T491D336K035AT.pdf, NameRUS=Конденсатор
C8 C9: library part C_POLAR, "Конденсатор полярный / тантал", IPSPartNumber=300-47-868, Manufacturer=KEMET, ManufacturerPartNumber=T491B476K006AT, Package="Case B", Tolerance="± 10 %", ValueDescription="Конденсатор 47 мкФ ± 10 % 10 В Case B", Voltage="10 В", HelpURL=https://content.kemet.com/datasheets/KEM_T2005_T491.pdf, NameRUS=Конденсатор
C11: library part C, "Конденсатор", Dielectric=X7R, IPSPartNumber=65-765-65, Manufacturer=KEMET, ManufacturerPartNumber=C0805C103K5RAC7025, Package="SMD 0805", Tolerance="± 10 %", ValueDescription="Конденсатор 0,1 мкФ ± 10 % 50 В X7R SMD 0805", Voltage="50 В", HelpURL=https://content.kemet.com/datasheets/KEM_C1002_X7R_SMD.pdf, NameRUS=Конденсатор
C12: library part C, "Конденсатор", Dielectric=C0G, IPSPartNumber=165-72-398, Manufacturer=KEMET, ManufacturerPartNumber=C0805C680J5GACTU, Package="SMD 0805", Tolerance="± 5 %", ValueDescription="Конденсатор 68 пФ ± 5 % 50 В C0G SMD 0805", Voltage="50 В", NameRUS=Конденсатор
C13 C16 C17: library part C_POLAR, "Конденсатор полярный / тантал", IPSPartNumber=300-47-868, Manufacturer=KEMET, ManufacturerPartNumber=T491B476K006AT, Package="Case A", Tolerance="± 10 %", ValueDescription="Конденсатор 10 мкФ ± 10 % 10 В Case A", Voltage="10 В", HelpURL=https://content.kemet.com/datasheets/KEM_T2005_T491.pdf, NameRUS=Конденсатор
C14 C15: library part C, "Конденсатор", Manufacturer=KEMET, Package="SMD 0805", Tolerance="± 10 %", ValueDescription="Конденсатор 0,1 мкФ ± 10 % 50 В * SMD 0805", Voltage="50 В", NameRUS=Конденсатор
C18 C19 C20 C21 C22 C23 C24 C25 C26 C27: library part C, "Конденсатор", Dielectric=X7R, IPSPartNumber=65-724-19, Manufacturer=KEMET, ManufacturerPartNumber=C0603C, Package="SMD 0603", Tolerance="± 10 %", ValueDescription="Конденсатор 0,1 мкФ ± 10 % 50 В X7R SMD 0603", Voltage="50 В", HelpURL=https://content.kemet.com/datasheets/KEM_C1002_X7R_SMD.pdf, NameRUS=Конденсатор
DA1: library part DA_TPS54302, "DC/DC Buck", Manufacturer="Texas Instruments", ManufacturerPartNumber=TPS54302DDCR, Package=SOT23-6, ValueDescription="Микросхема TPS54302 SOT23-6", HelpURL=https://www.ti.com/lit/ds/symlink/tps54302.pdf?HQS=TI-null-null-digikeymode-df-pf-null-wwe&ts=1594294685289, NameRUS=Микросхема
DA2: library part DA_LD1117AS33, "Linear Regulator 3.3V", Manufacturer=STMicroelectronics, ManufacturerPartNumber=LD1117AS33TR, Package=SOT-223, HelpURL=https://eu.mouser.com/ProductDetail/STMicroelectronics/LD1117AS33TR?qs=C3bf%2FVrkE5CoDDd7wyn%252BaQ%3D%3D
DD1 DD2 DD3 DD4: library part DD_MCP23S17, "I/O Expander 16 SPI", Package=SOIC-28, HelpURL=https://www.chipdip.ru/product/mcp23s17-e-so, MF=Microchip, MFPartNum=MCP23S17
DD5 DD6 DD7 DD8 DD9 DD10: library part DD_SN74LS07D, "6-ch, 4.75_5.25V bipolar buffers with OC outputs", Package=SOIC-14, HelpURL=https://www.chipdip.by/product/sn74ls07d, MF="Texas Instruments", MFPartNum=SN74LS07D
FU1: library part FU, "Предохранитель", ManufacturerPartNumber="RND 170-00190", ValueDescription="Предохранитель 1 A RND 170-00190", HelpURL=https://www.elfa.se/en/fuse-holder-clip-20-mm-3a-rnd-components-rnd-170-00190/p/30113404, NameRUS=Предохранитель
HL1: library part VD_LED, "Светодиод", Manufacturer=Foryard, ManufacturerPartNumber=FYLS-0805UBC, Package="SMD 0805", ValueDescription="Светодиод FYLS-0805UBC SMD 0805", NameRUS=Светодиод
HL2: library part VD_LED, "Светодиод", Manufacturer=Foryard, ManufacturerPartNumber=FYLS-0805URC, Package="SMD 0805", ValueDescription="Светодиод FYLS-0805URC SMD 0805", NameRUS=Светодиод
HL3: library part VD_LED, "Светодиод", Manufacturer=Foryard, ManufacturerPartNumber=FYLS-0805UGC, Package="SMD 0805", ValueDescription="Светодиод FYLS-0805UGC SMD 0805", NameRUS=Светодиод
J1 J2: library part Jumper, "Перемычка на плату"
L1 L2: library part L_CORE, "Индуктивность", Manufacturer=Vishay, ManufacturerPartNumber=IHLP2525EZER100M01, Tolerance="± 20 %", ValueDescription="Дроссель 10 мкГн ± 20 % 4.5А", AddDescription=4.5А, HelpURL=https://www.vishay.com/docs/34177/ihlp-2525ez-01.pdf, NameRUS=Дроссель
R1 R10 R12: library part R_0.125W, "Резистор 0.125 W", Manufacturer=Vishay, ManufacturerPartNumber=CRCW080513K3FKEA, Package="SMD 0805", Tolerance="± 1 %", ValueDescription="Резистор 4,7 кОм ± 1 % SMD 0805", HelpURL=https://www.vishay.com/docs/20035/dcrcwe3.pdf, NameRUS=Резистор
R2: library part R_0.125W, "Резистор 0.125 W", Manufacturer=Vishay, ManufacturerPartNumber=CRCW080513K3FKEA, Package="SMD 0805", Tolerance="± 1 %", ValueDescription="Резистор 21 кОм ± 1 % SMD 0805", HelpURL=https://www.vishay.com/docs/20035/dcrcwe3.pdf, NameRUS=Резистор
R3: library part R_0.125W, "Резистор 0.125 W", Manufacturer=Vishay, ManufacturerPartNumber=CRCW080513K3FKEA, Package="SMD 0805", Tolerance="± 5 %", ValueDescription="Резистор 560 кОм ± 5 % SMD 0805", HelpURL=https://www.vishay.com/docs/20035/dcrcwe3.pdf, NameRUS=Резистор
R4: library part R_0.125W, "Резистор 0.125 W", Manufacturer=Vishay, ManufacturerPartNumber=CRCW080513K3FKEA, Package="SMD 0805", Tolerance="± 5 %", ValueDescription="Резистор 33 кОм ± 5 % SMD 0805", HelpURL=https://www.vishay.com/docs/20035/dcrcwe3.pdf, NameRUS=Резистор
R5: library part R_0.125W, "Резистор 0.125 W", Manufacturer=Vishay, ManufacturerPartNumber=CRCW080513K3FKEA, Package="SMD 0805", Tolerance="± 5 %", ValueDescription="Резистор 100 кОм ± 5 % SMD 0805", HelpURL=https://www.vishay.com/docs/20035/dcrcwe3.pdf, NameRUS=Резистор
R6: library part R_0.125W, "Резистор 0.125 W", Manufacturer=Vishay, ManufacturerPartNumber=CRCW080513K3FKEA, Package="SMD 0805", Tolerance="± 1 %", ValueDescription="Резистор 13,3 кОм ± 1 % SMD 0805", HelpURL=https://www.vishay.com/docs/20035/dcrcwe3.pdf, NameRUS=Резистор
R7: library part R_0.125W, "Резистор 0.125 W", Manufacturer=Vishay, ManufacturerPartNumber=CRCW080513K3FKEA, Package="SMD 0805", Tolerance="± 1 %", ValueDescription="Резистор 4,3 кОм ± 1 % SMD 0805", HelpURL=https://www.vishay.com/docs/20035/dcrcwe3.pdf, NameRUS=Резистор
R8: library part R_0.125W, "Резистор 0.125 W", Manufacturer=Vishay, ManufacturerPartNumber=CRCW080513K3FKEA, Package="SMD 0805", Tolerance="± 1 %", ValueDescription="Резистор 2 кОм ± 1 % SMD 0805", HelpURL=https://www.vishay.com/docs/20035/dcrcwe3.pdf, NameRUS=Резистор
R9 R16 R19 R22 R25 R28 R31 R34 R37 R40 R43 R46 R49 R52 R55 R58 R61 R67 R70 R73 R76 R79 R82 R85 R88 R91 R94 R97 R100 R103 R106 R109 R112: library part R_0.125W, "Резистор 0.125 W", Manufacturer=Vishay, ManufacturerPartNumber=CRCW080513K3FKEA, Package="SMD 0805", Tolerance="± 1 %", ValueDescription="Резистор 100 Ом ± 1 % SMD 0805", HelpURL=https://www.vishay.com/docs/20035/dcrcwe3.pdf, NameRUS=Резистор
R11: library part R_0.125W, "Резистор 0.125 W", Manufacturer=Vishay, ManufacturerPartNumber=CRCW080513K3FKEA, Package="SMD 0805", Tolerance="± 1 %", ValueDescription="Резистор 1 кОм ± 1 % SMD 0805", HelpURL=https://www.vishay.com/docs/20035/dcrcwe3.pdf, NameRUS=Резистор
R13 R14 R15 R64 R65 R66 R131 R132 R133 R166 R167 R168 R185 R186: library part R_0.125W, "Резистор 0.1 W", Manufacturer=Vishay, ManufacturerPartNumber=D11/CRCW0603, Package="SMD 0603", Tolerance="± 1 %", ValueDescription="Резистор 10 кОм ± 1 % SMD 0603", HelpURL=https://www.vishay.com/docs/20035/dcrcwe3.pdf, NameRUS=Резистор
R17 R20 R23 R26 R29 R32 R35 R38 R41 R44 R47 R50 R53 R56 R59 R62 R68 R71 R74 R77 R80 R83 R86 R89 R92 R95 R98 R101 R104 R107 R110 R113: library part R_0.125W, "Резистор 0.125 W", Manufacturer=Vishay, ManufacturerPartNumber=CRCW080513K3FKEA, Package="SMD 0805", Tolerance="± 1 %", ValueDescription="Резистор 390 Ом ± 1 % SMD 0805", HelpURL=https://www.vishay.com/docs/20035/dcrcwe3.pdf, NameRUS=Резистор
R18 R21 R24 R27 R30 R33 R36 R39 R42 R45 R48 R51 R54 R57 R60 R63 R69 R72 R75 R78 R81 R84 R87 R90 R93 R96 R99 R102 R105 R108 R111 R114 R187: library part R_0.125W, "Резистор 0.125 W", Manufacturer=Vishay, ManufacturerPartNumber=CRCW080513K3FKEA, Package="SMD 0805", Tolerance="± 1 %", ValueDescription="Резистор 10 кОм ± 1 % SMD 0805", HelpURL=https://www.vishay.com/docs/20035/dcrcwe3.pdf, NameRUS=Резистор
R115 R116 R117 R118 R119 R120 R121 R122 R123 R124 R125 R126 R127 R128 R129 R130 R150 R151 R152 R153 R154 R155 R156 R157 R158 R159 R160 R161 R162 R163 R164 R165: library part R_0.125W, "Резистор 0.1 W", Manufacturer=Vishay, ManufacturerPartNumber=D11/CRCW0603, Package="SMD 0603", Tolerance="± 1 %", ValueDescription="Резистор 4,7кОм ± 1 % SMD 0603", HelpURL=https://www.vishay.com/docs/20035/dcrcwe3.pdf, NameRUS=Резистор
R134 R135 R136 R137 R138 R139 R140 R141 R142 R143 R144 R145 R146 R147 R148 R149 R169 R170 R171 R172 R173 R174 R175 R176 R177 R178 R179 R180 R181 R182 R183 R184: library part R_0.125W, "Резистор 0.125 W", Manufacturer=Vishay, ManufacturerPartNumber=CRCW080513K3FKEA, Package="SMD 0805", Tolerance="± 1 %", ValueDescription="Резистор 2,2 кОм ± 1 % SMD 0805", HelpURL=https://www.vishay.com/docs/20035/dcrcwe3.pdf, NameRUS=Резистор
TP1 TP2: library part TEST_POINT, "Test Point"
VD1: library part VD_SHOTTKY, "Диод Шоттки", Manufacturer="Taiwan Semiconductor", Package="DO-214AC (SMA)", ValueDescription="Диод Шоттки TSSA5U60 E3G DO-214AC (SMA)", Analogue=SS56, HelpURL=https://ru.mouser.com/datasheet/2/395/TSSA5U50%20SERIES_D1512-911402.pdf, ManufacturerPartNumber="TSSA5U60 E3G", NameRUS="Диод Шоттки"
VD2: library part VD_TVS_BIDIR, "Супрессор", Manufacturer=STMicroelectronics, Package="DO-214AA (SMB)", ValueDescription="Супрессор SMBJ24CA DO-214AA (SMB)", HelpURL=https://www.chipdip.by/product/smbj24ca-sunmate, ManufacturerPartNumber=SMBJ24CA, NameRUS=Супрессор
VD3: library part VD_TVS_BIDIR, "Супрессор", IPSPartNumber=300-34-034, Manufacturer=STMicroelectronics, Package="DO-214AA (SMB)", ValueDescription="Супрессор SMBJ5.0CA-TR DO-214AA (SMB)", HelpURL=https://www.chipdip.ru/product0/8001777571, ManufacturerPartNumber=SMBJ5.0CA-TR, NameRUS=Супрессор
VD4: library part VD_ZENER, "Стабилитрон", Manufacturer=Nexperia, Package=SOD323, ValueDescription="Стабилитрон MM3Z12VT1G SOD323", Analogue=BZX384-C12,115, HelpURL=https://eu.mouser.com/datasheet/2/916/MM3Z_SER-2487701.pdf, ManufacturerPartNumber=MM3Z12VT1G, NameRUS=Стабилитрон
VD5 VD6 VD7 VD8 VD9 VD10 VD11 VD12 VD13 VD14 VD15 VD16 VD17 VD18 VD19 VD20 VD21 VD22 VD23 VD24 VD25 VD26 VD27 VD28 VD29 VD30 VD31 VD32 VD33 VD34 VD35 VD36: library part VD, "Диод Выпрямительный", Manufacturer="Taiwan Semiconductor", ManufacturerPartNumber=HER108G, Package=DO-204AL-2, ValueDescription="Диод выпрямительный HER108 DO-204AL-2", HelpURL=https://eu.mouser.com/ProductDetail/?qs=tHU%2FlV7kTySN6KO41tibrA%3D%3D, NameRUS="Диод выпрямительный"
VD37 VD38: library part VD, "Диод Выпрямительный", Manufacturer="Diotec Semiconductor", Package=SOD-323F, ValueDescription="Диод выпрямительный 1N4148WS SOD-323F", HelpURL=https://www.chipdip.by/product/1n4148ws-4, ManufacturerPartNumber=1N4148WS, NameRUS="Диод выпрямительный"
VT1: library part VT_N-MOSFET, "MOSFET", Manufacturer="Infineon Technologies", ManufacturerPartNumber=IRFZ44NPBF, Package=TO-220AB, ValueDescription="N-канальный полевой транзистор IRFZ44NPBF * * TO-220AB", NameRUS="N-канальный полевой транзистор"
VT2: library part VT_NPN, "NPN транзистор", Current=0.1, Manufacturer="Nexperia B.V.", ManufacturerPartNumber=BC846B,215, Package=SOT-23, ValueDescription="NPN биполярный транзистор BC846B,215 65 0.1 SOT-23", Voltage=65, HelpURL=https://www.chipdip.by/product/bc846b, NameRUS="NPN биполярный транзистор"
VT3: library part VT_P-MOSFET, "P-MOSFET", Current=2.3, Package=SOT-23, Voltage=30, HelpURL=https://www.chipdip.by/product/irlml9303trpbf, MF="INFINEON TECHNOLOGIES AG.", MFPartNum=IRLML9303TRPBF
VT4 VT5 VT6 VT7 VT8 VT9 VT10 VT11 VT12 VT13 VT14 VT15 VT16 VT17 VT18 VT19 VT20 VT21 VT22 VT23 VT24 VT25 VT26 VT27 VT28 VT29 VT30 VT31 VT32 VT33 VT34 VT35: library part VT_N-MOSFET, "MOSFET", Current="15 А", Manufacturer=Интеграл, Package=TO-220, Voltage="100 В", Analogue=IRL530N, HelpURL=https://belchip.by/product/?selected_product=10167, ManufacturerPartNumber=КП745Г
VT36 VT37 VT38 VT39 VT40 VT41 VT42 VT43 VT44 VT45 VT46 VT47 VT48 VT49 VT50 VT51: library part VT_2xOPTOCOUPLER, "Оптопара", Manufacturer=Vishay, Package=SOIC-8, HelpURL=https://www.chipdip.by/product/ild207-t, ManufacturerPartNumber=ILD207T
XP1 XP2: library part XP1, "Клемма папа", HelpURL=https://www.chipdip.by/product/ta-m, ManufacturerPartNumber=KLS8-01128-PC-250
XP3: library part XP9, "вилка 9 контактов", Manufacturer="JST Corporation", ValueDescription="Разъем вилка B9B-XH-A", Analogue="CWF-9; WK-09; DS1069-9MVW6; CWF-9 W7600-09PSNTW0R", HelpURL=https://www.chipdip.ru/product0/8007237297?from=suggest_product, ManufacturerPartNumber=B9B-XH-A, NameRUS="Разъем вилка", NET1=NU, NET2=NSS, NET3=SCK, NET4=MISO, NET5=MOSI, NET6=Signal1, NET7=Signal2, NET8=Resolution_5V, NET9=GND
XS1 XS2 XS3 XS4 XS5 XS6 XS7 XS8 XS9 XS10 XS11 XS12: library part XS8, "розетка 8 контактов", Manufacturer="Degson Electronics", ManufacturerPartNumber="DG142V-5.08- 08P-14-00A(H)", ValueDescription="Разъем розетка DG142V-5.08- 08P", HelpURL=https://www.chipdip.by/product0/8077186472, NameRUS="Разъем розетка"
  XS1: NET1=pwrOut_1, NET2=pwrOut_2, NET3=pwrOut_3, NET4=pwrOut_4, NET5=pwrOut_5, NET6=pwrOut_6, NET7=pwrOut_7, NET8=pwrOut_8
  XS2: NET1=pwrOut_9, NET2=pwrOut_10, NET3=pwrOut_11, NET4=pwrOut_12, NET5=pwrOut_13, NET6=pwrOut_14, NET7=pwrOut_15, NET8=pwrOut_16
  XS3: NET1=pwrOut_17, NET2=pwrOut_18, NET3=pwrOut_19, NET4=pwrOut_20, NET5=pwrOut_21, NET6=pwrOut_22, NET7=pwrOut_23, NET8=pwrOut_24
  XS4: NET1=pwrOut_25, NET2=pwrOut_26, NET3=pwrOut_27, NET4=pwrOut_28, NET5=pwrOut_29, NET6=pwrOut_30, NET7=pwrOut_31, NET8=pwrOut_32
  XS5: NET1=Sensor_1, NET2=GND, NET3=Sensor_2, NET4=GND, NET5=Sensor_3, NET6=GND, NET7=Sensor_4, NET8=GND
  XS6: NET1=Sensor_5, NET2=GND, NET3=Sensor_6, NET4=GND, NET5=Sensor_7, NET6=GND, NET7=Sensor_8, NET8=GND
  XS7: NET1=Sensor_9, NET2=GND, NET3=Sensor_10, NET4=GND, NET5=Sensor_11, NET6=GND, NET7=Sensor_12, NET8=GND
  XS8: NET1=Sensor_13, NET2=GND, NET3=Sensor_14, NET4=GND, NET5=Sensor_15, NET6=GND, NET7=Sensor_16, NET8=GND
  XS9: NET1=Sensor_17, NET2=GND, NET3=Sensor_18, NET4=GND, NET5=Sensor_19, NET6=GND, NET7=Sensor_20, NET8=GND
  XS10: NET1=Sensor_21, NET2=GND, NET3=Sensor_22, NET4=GND, NET5=Sensor_23, NET6=GND, NET7=Sensor_24, NET8=GND
  XS11: NET1=Sensor_25, NET2=GND, NET3=Sensor_26, NET4=GND, NET5=Sensor_27, NET6=GND, NET7=Sensor_28, NET8=GND
  XS12: NET1=Sensor_29, NET2=GND, NET3=Sensor_30, NET4=GND, NET5=Sensor_31, NET6=GND, NET7=Sensor_32, NET8=GND

## Free pads (board coordinates)
  round 6.5 hole 3.6: 1(5,5) 1(5,105) 1(114.5,5) 1(160,89) 1(300,5) 1(300,105)

## Via types
v1: diameter 0.8, hole 0.5, Top Layer to Bottom Layer, 201 vias
v2: diameter 1.6, hole 0.9, Top Layer to Bottom Layer, 8 vias
v3: diameter 1.3, hole 0.6, Top Layer to Bottom Layer, 6 vias

## Nets (pads, with @x,y where several pads share a name; then routed paths per layer and width w, separated by ;. In a path a pad name is that pad's centre, name@x,y a point inside that pad or via, vN(x,y) a via of type N, cw(c..) or ccw(c..) an arc to the next point about the centre after c; other vN are vias at no path point)
+3.3V: C18.2 C19.2 C20.2 C21.2 DD1.9 DD2.9 DD3.9 DD4.9 J2.2 R8.1 R64.2 R115.2 R116.2 R117.2 R118.2 R119.2 R120.2 R121.2 R122.2 R123.2 R124.2 R125.2 R126.2 R127.2 R128.2 R129.2 R130.2 R132.2 R150.2 R151.2 R152.2 R153.2 R154.2 R155.2 R156.2 R157.2 R158.2 R159.2 R160.2 R161.2 R162.2 R163.2 R164.2 R165.2 R166.2 R167.2 | length 497.6
  Top Layer w0.5: R157.2@28.8,66.85 v1(30.15,66.85) ; R156.2@28.8,72.4 v1(28.8,73.75) ; v1(28.8,78.2) R155.2@28.8,79.55 ; R154.2@28.8,85.1 v1(28.8,86.45) ; v1(32.545,81.19) R153.2@33.895,81.19 ; R152.2@39.5,81.2 v1(40.85,81.2) ; v1(45.3,81.2) R151.2@46.65,81.2 ; v1(50.9,69.95) C21.2@52.2,69.95 ; R150.2@52.2,81.2 v1(53.55,81.2) ; C21.2@52.31,69.84 DD4.9@54.3,69.84 ; R166.2@67.45,63.5 68.3,63.5 68.75,63.95 v1(68.75,64.8) R167.2@67.45,64.8 ; v1(78.5,81.2) R165.2@79.85,81.2 ; R164.2@85.4,81.2 v1(86.75,81.2) ; v1(91.3,81.2) R163.2@92.65,81.2 ; R162.2@98.2,81.2 v1(99.55,81.2) ; DD1.9@98.5,63.66 C18.2@100.49,63.66 ; C18.2@100.6,63.55 v1(101.9,63.55) ; v1(116.9,81.2) R161.2@118.25,81.2 ; R160.2@123.8,81.2 v1(125.15,81.2) ; v1(137.2,81.2) R159.2@138.55,81.2 ; R158.2@144.1,81.2 v1(145.45,81.2) ; v1(144.7,72) R64.2@146.05,72 ; DD2.9@159.2,65.66 C19.2@161.19,65.66 ; C19.2@161.3,65.55 v1(162.6,65.55) ; v1(170.65,81.25) R122.2@172,81.25 ; R121.2@177.5,81.25 v1(178.85,81.25) ; v1(190.95,81.25) R120.2@192.3,81.25 ; R119.2@197.8,81.25 v1(199.15,81.25) ; v1(216.65,81.25) R118.2@218,81.25 ; R117.2@223.5,81.25 v1(224.85,81.25) ; v1(229.35,81.25) R116.2@230.7,81.25 ; R115.2@236.2,81.25 v1(237.55,81.25) ; v1(238.2,69.95) C20.2@239.5,69.95 239.61,69.84 DD3.9@241.6,69.84 ; R132.2@254.75,64.8 v1(256.1,64.8) ; v1(254.95,81.25) R130.2@256.3,81.25 ; R8.1@259,45.4 259,48 ; R129.2@261.8,81.25 v1(263.15,81.25) ; v1(274.85,77.05) R126.2@276.2,77.05 ; v1(275.25,81.2) R128.2@276.6,81.2 ; v1(276.2,57.45) R123.2@276.2,58.8 ; R124.2@276.2,64.35 v1(276.2,65.7) ; v1(276.2,70.2) R125.2@276.2,71.55 ; R127.2@282.1,81.2 v1(283.45,81.2)
  Top Layer w1.5: J2.2@254.1,48 259,48 v3(276.2,48)
  Bottom Layer w0.5: v1(50.9,69.95) 50.9,81.2 ; v1(68.75,64.8) 68.75,81.2 ; v1(101.9,63.55) 103.05,63.55 104.5,65 104.5,81.2 ; v1(144.7,72) 144.7,81.2 ; 161,81.2 161,67.15 v1(162.6,65.55) ; v1(238.2,69.95) 238.2,81.2 ; v1@254.95,81.2 v1(254.95,81.25) 256.1,81.25 v1(256.1,64.8)
  Bottom Layer w1.5: v1(28.8,86.45) 28.8,81.19 ; v1(30.15,66.85) 28.8,68.2 v1(28.8,73.75) v1(28.8,78.2) 28.8,81.19 ; v3(276.2,48) v1(276.2,57.45) v1(276.2,70.2) 276.2,75.7 v1(274.85,77.05) v1@274.85,81.2 ; v1(283.45,81.2) v1@274.85,81.2 ; 28.8,81.19 v1(32.545,81.19) 32.555,81.2 v1(40.85,81.2) 50.9,81.2 v1(53.55,81.2) 68.75,81.2 v1(86.75,81.2) v1(91.3,81.2) v1(99.55,81.2) 104.5,81.2 v1(125.15,81.2) 144.7,81.2 v1(145.45,81.2) 161,81.2 238.2,81.2 254.95,81.2 263.15,81.2 v1@274.85,81.2